# Altium PCB RF_PCB-v2.PcbDoc (part 1 of 2)
Units mm, origin at the board's own origin, x right, y up, seen from the top; angles counter-clockwise.
Board outline 99.5 x 79.5 mm, 2 copper layers (Top Layer, Bottom Layer); 69 components, 53 nets, 337 pads, 75 vias.
Unrouted connection lines stored in the file: 1.
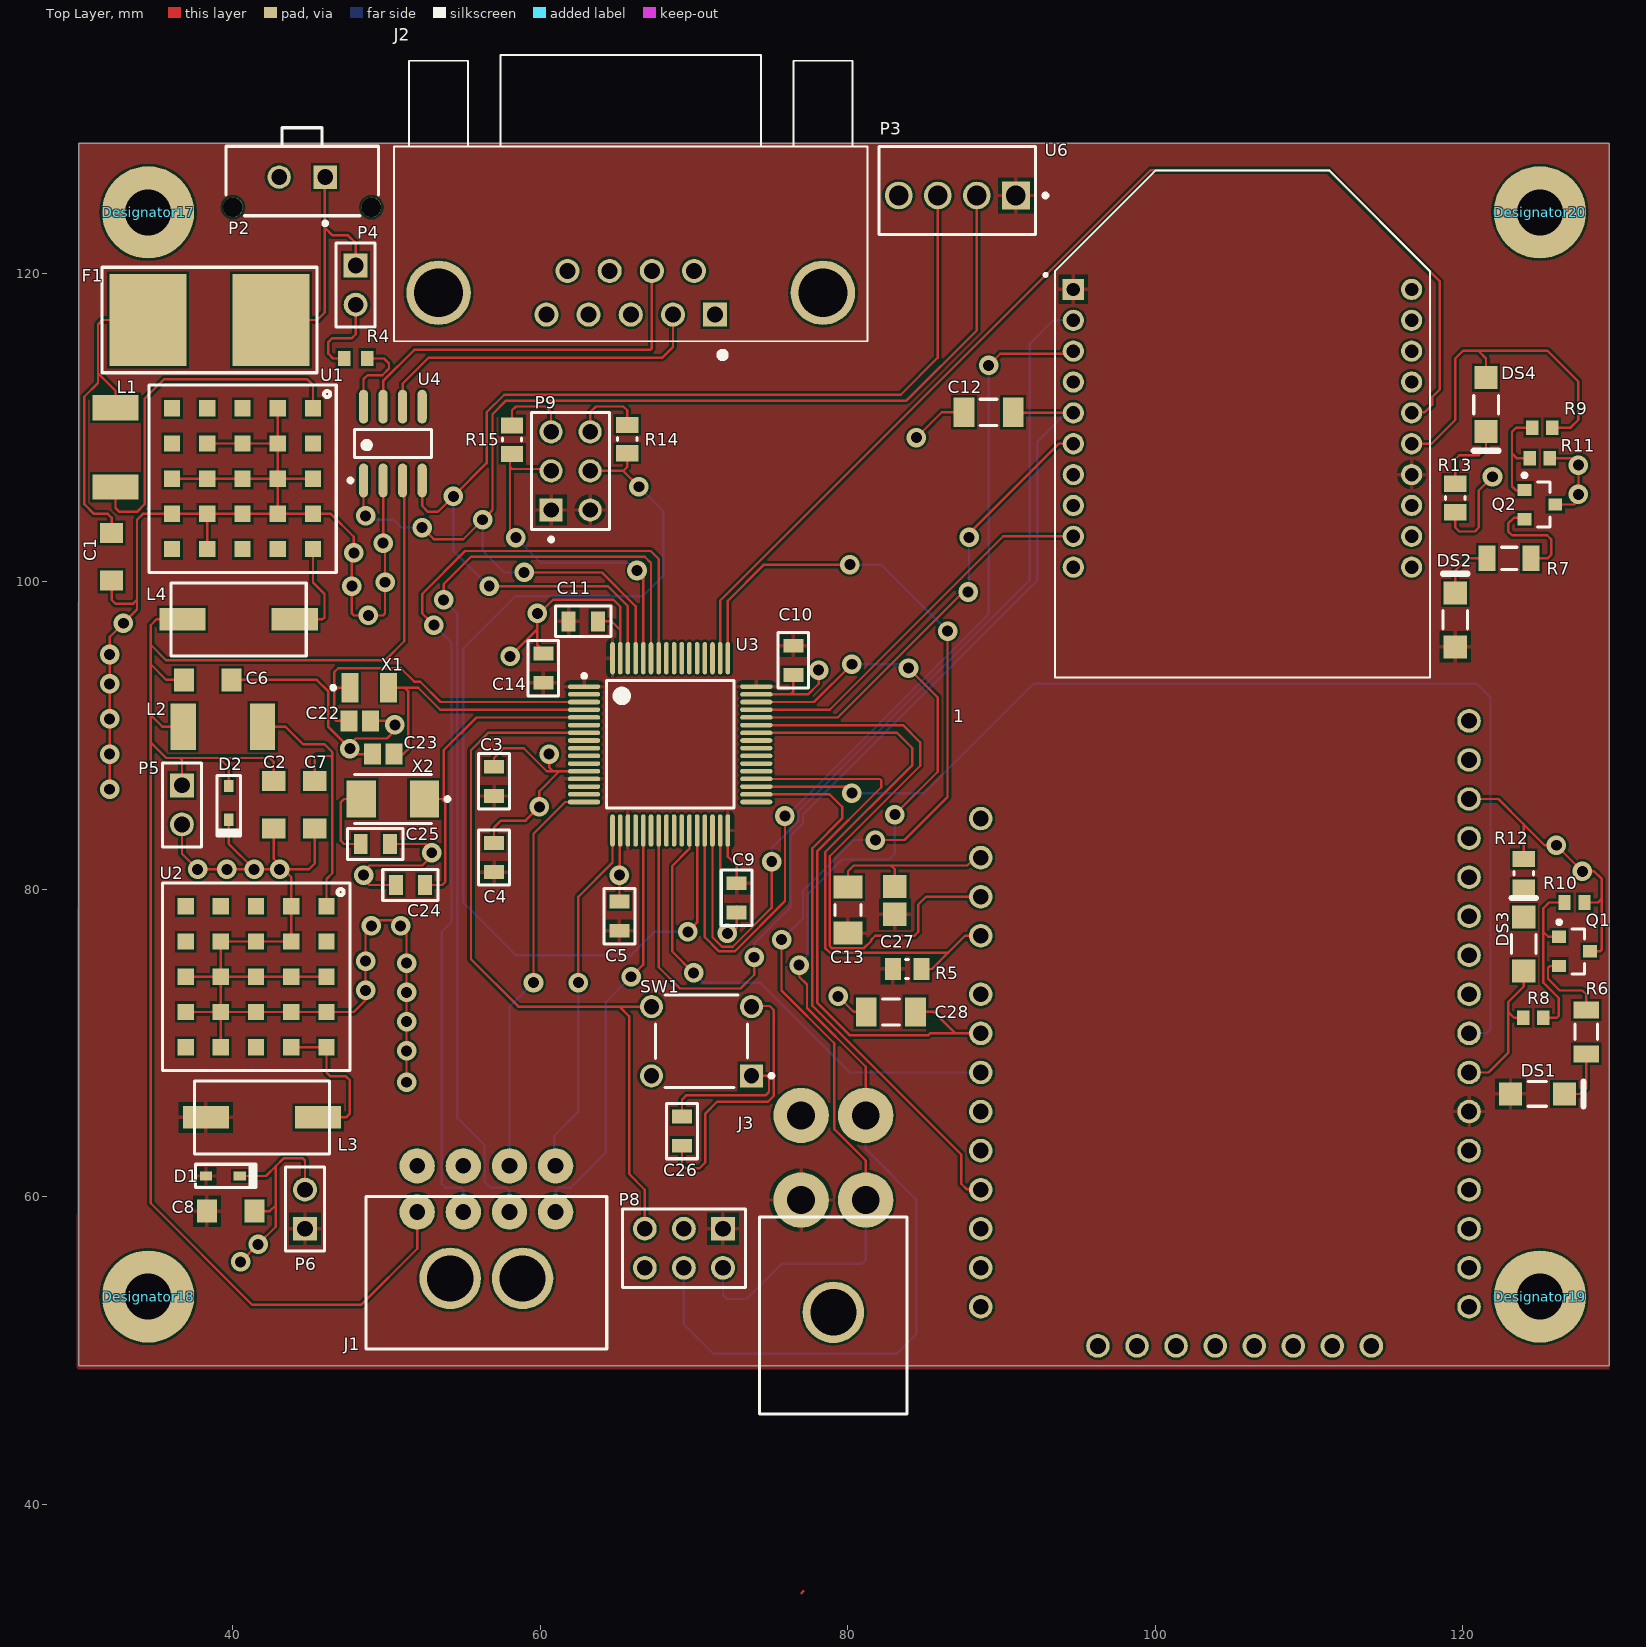
[diagram p0: Top Layer view]
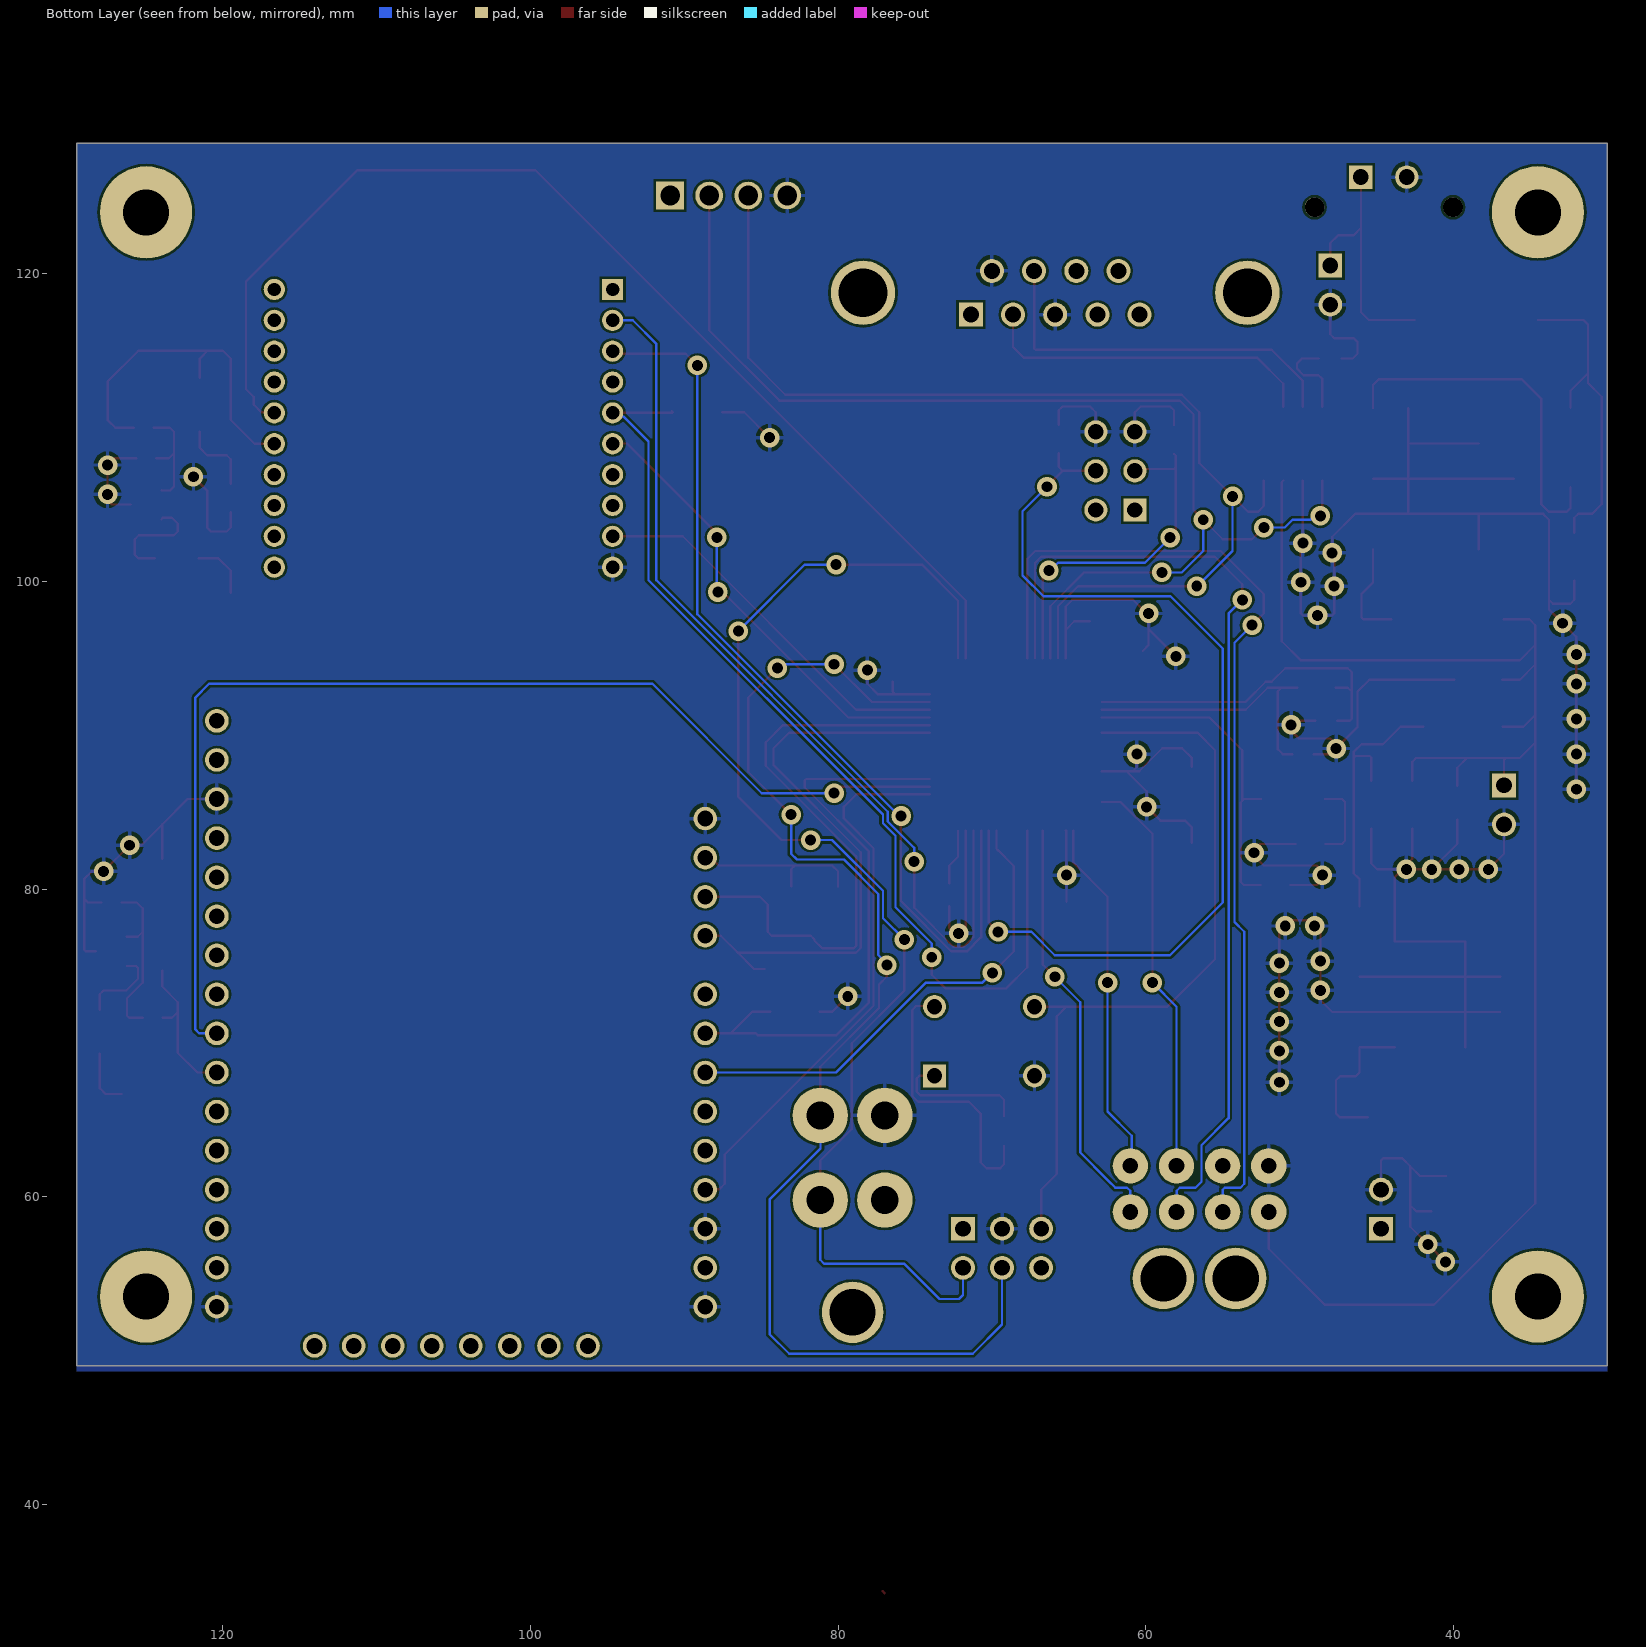
[diagram p1: Bottom Layer view, seen from below]

## Layer stack, top to bottom
Top Solder: solder mask 0.0102, Solder Resist, Dk 3.5
Top Layer: signal copper 0.0356
Dielectric 1: dielectric 0.32, FR-4, Dk 4.8
Bottom Layer: signal copper 0.0356
Bottom Solder: solder mask 0.0102, Solder Resist, Dk 3.5

## Board outline
30,49 129.5,49 129.5,128.5 30,128.5

## Design rules (kind name [scope] priority, off if disabled: settings)
Clearance [All] p1: gap=0.152 ignorepadtopadclearanceinfootprint=FALSE
HoleSize [All] p1: absolutevalues=TRUE maxlimit=100 minlimit=0.4 maxpercent=80.000 minpercent=20.000
PolygonConnect [All] p1: connectstyle=Relief reliefconductorwidth=0.254 reliefentries=4 polygonreliefangle="90 Angle" airgapwidth=0.254
RoutingVias [All] p1: holewidth=0.4 width=0.8 viastyle="Through Hole" minholewidth=0.8 minwidth=0.6 maxholewidth=100 maxwidth=100
SilkToSilkClearance [All] p1: silktosilkclearance=0
SilkToSolderMaskClearance [IsPad] p1: minsilkscreentomaskgap=0 clearancetoexposedcopper=TRUE
SolderMaskExpansion [All] p1: expansion=0.102 istentingtop=FALSE
Width [All] p1: maxlimit=100 minlimit=0.152 preferedwidth=0.152
27 further rules are at their usual default settings.

## Classes and differential pairs
component class RF_Xbee: 1 C12 C13 C27 C28 DS1 DS2 DS3 DS4 Q1 Q2 R5 R6 R7 R8 R9 R10 R11 R12 R13 U6
component class RF_STM: C3 C4 C5 C9 C10 C11 C14 C22 C23 C24 C25 C26 J1 J2 J3 P3 P8 P9 R4 R14 R15 SW1 U3 U4 X1 X2
component class RF_Power: C1 C2 C6 C7 C8 D1 D2 F1 L1 L2 L3 L4 P2 P4 P5 P6 U1 U2

## Components (designator, comment, footprint, x,y, rotation, side; value= is the part's Value field where it differs from the comment)
1 "XBEE_SMD_ADAPTER" XBEE_SMD_ADAPTER 105.156,71.882 r0 top
C1 "10uF" 1206 32.131,101.6 r270 top
C2 "22uF" 1206 42.672,85.471 r90 top
C3 "1uF" C0805 57,87 r90 top
C4 "0.1uF" C0805 57,82.05 r270 top
C5 "0.1uF" C0805 65.151,78.232 r270 top
C6 "10uF" 1206 38.38,93.599 r0 top
C7 "10uF" 1206 45.339,85.471 r90 top
C8 "22uF" 1206 39.878,59.055 r180 top
C9 "0.1uF" C0805 72.771,79.429 r90 top
C10 "0.1uF" C0805 76.454,94.869 r270 top
C11 "0.1uF" C0805 62.799,97.409 r180 top
C12 "0.01uF" CAPC1206(3216)170_M 89.154,110.998 r0 top value=10nF
C13 "1uF" CAPC3216X180X50ML20T25 80.01,78.637 r270 top
C14 "0.1uF" C0805 60.198,94.361 r270 top
C22 "6nF" CAPC2013X140X50LL20T25 48.26,90.932 r180 top
C23 "6nF" CAPC2013X140X50LL20T25 49.784,88.773 r0 top
C24 "20pF" C0805 51.562,80.264 r0 top
C25 "20pF" C0805 49.276,82.931 r180 top
C26 "0.1uF" C0805 69.215,64.262 r90 top
C27 "100pF" CAPC2013X88X50ML20T25 83.058,79.259 r270 top
C28 "0.01uF" CAPC1206(3216)170_M 82.804,72.009 r0 top value=10nF
D1 "TVS Diode 3V3" SOD-323 39.37,61.341 r180 top
D2 "TVS Diode 5V" SOD-323 39.751,85.598 r90 top
Designator17 "Comment" "3mm Mounting Hole" 34.5,124 r0 top
Designator18 "Comment" "3mm Mounting Hole" 34.5,53.5 r0 top
Designator19 "Comment" "3mm Mounting Hole" 125,53.5 r0 top
Designator20 "Comment" "3mm Mounting Hole" 125,124 r0 top
DS1 "HSMH-C150" AVAG-HSMX-C150_V 124.841,66.675 r0 top
DS2 "HSMH-C150" AVAG-HSMX-C150_V 119.5,97.5 r90 top
DS3 "HSMH-C150" AVAG-HSMX-C150_V 123.952,76.426 r90 top
DS4 "HSMH-C150" AVAG-HSMX-C150_V 121.5,111.5 r270 top
F1 "Fuseholder" "SCHURTER - 0031.7701.11 - FUSE HOLDER, PCB MOUNT" 38.5,117 r180 top
J1 "43045-0800" "Micro-Fit 3.0 8pos" 56.5,59 r0 top
J2 "D-Sub9 Header, RA" "D9 Connector" 65.786,123.952 r180 top
J3 "0353180420" "Mini-fit Jr. 4pos" 79.062,58.878 r0 top
L1 "70" 1812 32.385,108.712 r90 top
L2 "70" 1812 39.37,90.551 r180 top
L3 "98" 7427932 41.91,65.151 r180 top
L4 "98" 7427932 40.386,97.536 r180 top
P2 "66200211122" 66200211122 44.522,126.038 r0 top
P3 "640456-4" TECO-640456-4 87.122,125.095 r0 top
P4 "12V EXT" SMTC-TSW-102-26-XX-S 48,120.54 r270 top
P5 "5V EXT" SMTC-TSW-102-26-XX-S 36.703,86.741 r270 top
P6 "3V3 EXT" SMTC-TSW-102-26-XX-S 44.704,57.912 r90 top
P8 "SWD" SMTC-TSW-103-08-X-D 71.882,57.912 r180 top
P9 "M20-9980346" HRWN-M20-9980346_V 61.976,107.188 r90 top
Q1 "BJT" ONSC-SOT-23-3-318-08_V 127.254,75.946 r0 top
Q2 "BJT" ONSC-SOT-23-3-318-08_V 125,105 r0 top
R4 "1K" RESC1608X55X25ML10T15 48,114.5 r0 top
R5 "1K" RESC2013X50X30NL20T20 83.856,74.803 r180 top
R6 "464 Ohm" RESC3216X70X50NL05T20 128.016,70.711 r270 top
R7 "464 Ohm" RESC3216X70X50NL05T20 123,101.5 r180 top
R8 "10K" RESC1609X50X30NL8T20 124.572,71.628 r0 top
R9 "10K" RESC1609X50X30NL8T20 125.15,110 r180 top
R10 "10K" RESC1609X50X30NL8T20 127.254,79.121 r0 top
R11 "10K" RESC1609X50X30NL8T20 125,108 r0 top
R12 "1K" RESC2013X50X30NL20T20 123.952,81.026 r270 top
R13 "1K" RESC2013X50X30NL20T20 119.5,105.425 r90 top
R14 "1K" RESC2013X50X30NL20T20 65.659,109.256 r270 top
R15 "1K" RESC2013X50X30NL20T20 58.166,109.22 r270 top
SW1 "PTS645SM43SMTR92LFS" ITT-PTS645S-4_V 70.485,70.104 r180 top
U1 "RPM5.0-1.0" 25-BLGA 40.644,106.684 r270 top
U2 "RPM3.3-1.0" 25-BLGA 41.525,74.295 r270 top
U3 "STM32F107RCT6" STM-LQFP64_M 68.453,89.408 r0 top
U4 "MCP2551-I/SN" SOIC-SN8_N 50.419,108.966 r90 top
U6 "XBP24CAUIT-001" *MODULE_XBP24CAUIT-001 105.664,110.236 r0 top
X1 "32.768KHz" ABRA-ABS07-2_V 48.895,93.091 r0 top
X2 "8MHz" ABRA-ABM3-2_V 50.419,85.852 r180 top

## Footprints (in the part's own frame and the unit in brackets; to place one, negate y for a bottom-side part, rotate by r counter-clockwise, add the part's x,y. Pads: shape width x height; smd on the part's side, far side on the other; paste and mask are expansions set on the pad)
"3mm Mounting Hole" [mm]
  round 6 hole 3: 1(0,0)
25-BLGA [mm]
  rect 1.06x1.06 smd: A1(-4.58,4.58) A2(-2.29,4.58) A3(0,4.58) A4(2.29,4.58) A5(4.58,4.58) B1(-4.58,2.29) B2(-2.29,2.29) B3(0,2.29) B4(2.29,2.29) B5(4.58,2.29) C1(-4.58,0) C2(-2.29,0) C3(0,0) C4(2.29,0) C5(4.58,0) D1(-4.58,-2.29) D2(-2.29,-2.29) D3(0,-2.29) D4(2.29,-2.29) D5(4.58,-2.29) E1(-4.58,-4.58) E2(-2.29,-4.58) E3(0,-4.58) E4(2.29,-4.58) E5(4.58,-4.58)
  silkscreen extent -6.09,-6.09 6.09,6.09
1206 [mm]
  rect 1.3x1.5 smd: 1(-1.55,0) 2(1.55,0)
1812 [mm]
  rect 1.65x3 smd: 1(2.575,0) 2(-2.575,0)
7427932 [mm]
  rect 3x1.47 smd: 1(-3.65,0) 2(3.65,0)
  silkscreen extent -4.4,-2.37 4.4,2.37, body extent -4.1,-2.38 4.1,2.37, height 3.21
66200211122 [mm] "3.00mm Male Single Row Vertical Header, 2p"
  rect 1.52x1.52 hole 1.02: 1(1.5,0.255)
  round 1.52 hole 1.02: 2(-1.5,0.255)
  round 1.27 hole 1.27 unplated: MH1(-4.5,-1.705) MH2(4.5,-1.705)
  silkscreen extent -4.95,-2.87 4.95,3.46, body extent -4.83,-2.18 4.83,3.38, height 9.93
*MODULE_XBP24CAUIT-001 [mil]
  rect 54.25x54.25 hole 34.25: 1(-433,344.5)
  round 54.25 hole 34.25: 2(-433,265.5) 3(-433,186.5) 4(-433,107.5) 5(-433,28.5) 6(-433,-50.5) 7(-433,-129.5) 8(-433,-208.5) 9(-433,-287.5) 10(-433,-366.5) 11(433,-366.5) 12(433,-287.5) 13(433,-208.5) 14(433,-129.5) 15(433,-50.5) 16(433,28.5) 17(433,107.5) 18(433,186.5) 19(433,265.5) 20(433,344.5)
  silkscreen extent -508,-648 480,648
ABRA-ABM3-2_V [mm] "SMD, 2-Leads, Body 5x3.2mm, Pitch 4.1mm"
  rect 1.9x2.4 smd: 1(-2.05,0) 2(2.05,0)
  silkscreen extent -3.68,-1.6 2.5,1.6, body extent -2.5,-1.6 2.5,1.6, height 1.3
ABRA-ABS07-2_V [mm] "Hand Drawn, 2-Leads, Body 3.2x1.5mm, Pitch 2.5mm"
  rect 1.1x1.9 smd: 1(-1.25,0) 2(1.25,0)
  silkscreen extent -2.47,-0.12 -2.22,0.12, body extent -1.6,-0.75 1.6,0.75, height 0.9
AVAG-HSMX-C150_V [mm] "SMD, 2-Leads, Body 3.2x1.6mm"
  rect 1.5x1.5 smd: 1(-1.75,0) 2(1.75,0)
  silkscreen extent -0.6,-0.8 3,0.8, body extent -1.6,-0.8 1.6,0.8, height 1.1
C0805 [mm]
  rect 0.9x1.3 smd: 1(-0.95,0) 2(0.95,0)
  silkscreen extent -1.8,-1 1.8,1, body extent -1.05,-0.67 1.05,0.67, height 0.94
CAPC1206(3216)170_M [mm] "Chip Capacitor, Body 3.2x1.6mm, Height 1.7mm, IPC Low Density"
  rect 1.35x1.9 smd: 1(-1.6,0) 2(1.6,0)
  silkscreen extent -0.55,-0.85 0.55,0.85, body extent -1.7,-0.9 1.7,0.9, height 1.7
CAPC2013X88X50ML20T25 [mm] "Chip Capacitor, 2-Leads, Body 2.00x1.25mm, IPC Low Density"
  rect 1.5x1.55 smd: 1(-0.9,0) 2(0.9,0)
  body extent -1.1,-0.72 1.1,0.72, height 0.88
CAPC2013X140X50LL20T25 [mm] "Chip Capacitor, 2-Leads, Body 2.00x1.25mm, IPC High Density"
  rect 1.1x1.35 smd: 1(-0.7,0) 2(0.7,0)
  body extent -1.1,-0.72 1.1,0.72, height 1.4
CAPC3216X180X50ML20T25 [mm] "Chip Capacitor, 2-Leads, Body 3.40x1.80mm, IPC Low Density"
  rect 1.5x1.9 smd: 1(-1.5,0) 2(1.5,0)
  silkscreen extent -0.35,-0.85 0.35,0.85, body extent -1.7,-0.9 1.7,0.9, height 1.8
"D9 Connector" [mil]
  rect 61.5x61.5 hole 41: 1(-220,260)
  round 61.5 hole 41: 2(-112,260) 3(-4,260) 4(104,260) 5(212,260) 6(-166,148) 7(-58,148) 8(50,148) 9(158,148)
  round 165 hole 125: None(-496,204) None(488,204)
  silkscreen extent -610,-405 602,371, body extent -619,-415 609,340, height 509
HRWN-M20-9980346_V [mm] "THD, 6-Leads, Body 7.62x5.08mm, Pitch 2.54mm"
  rect 1.5x1.5 hole 1: 1(-2.54,1.27)
  round 1.5 hole 1: 2(-2.54,-1.27) 3(0,1.27) 4(0,-1.27) 5(2.54,1.27) 6(2.54,-1.27)
  silkscreen extent -4.58,-2.54 3.81,2.54, body extent -3.81,-2.54 3.81,2.54, height 8.64
ITT-PTS645S-4_V [mm] "TH, 4-Leads, Body 6x6mm"
  rect 1.5x1.5 hole 1: 1(-3.25,2.25)
  round 1.5 hole 1: 2(3.25,2.25) 3(-3.25,-2.25) 4(3.25,-2.25)
  silkscreen extent -4.68,-3 3,3, body extent -3,-3 3,3, height 4.4
"Micro-Fit 3.0 8pos" [mm]
  round 2.3 hole 1.02: 1(4.5,0) 2(1.5,0) 3(-1.5,0) 4(-4.5,0) 5(4.5,3) 6(1.5,3) 7(-1.5,3) 8(-4.5,3)
  round 4 hole 3: ""(-2.35,-4.32) ""(2.35,-4.32)
  silkscreen extent -7.83,-8.92 7.83,1, body extent -8.07,-8.95 8.08,3.29, height 8.78
"Mini-fit Jr. 4pos" [mm]
  round 3.6 hole 1.8: 1(-2.1,6.4) 2(2.1,6.4) 3(-2.1,0.9) 4(2.1,0.9)
  round 4 hole 3: ""(0,-6.4)
  silkscreen extent -4.8,-13 4.8,-0.2, body extent -4.8,-13 5.2,6.94, height 11.41
ONSC-SOT-23-3-318-08_V [mm] "SOT23, 3-Leads, Body 2.92x1.3mm, Pitch 0.95mm"
  rect 0.9x0.8 smd: 1(-1,0.95) 2(-1,-0.95) 3(1,0)
  silkscreen extent -1.12,-1.46 0.65,2.02, body extent -0.65,-1.46 0.65,1.46, height 1.11
RESC1608X55X25ML10T15 [mm] "Chip Resistor, 2-Leads, Body 1.60x0.80mm, IPC Low Density"
  rect 0.8x1 smd: 1(-0.75,0) 2(0.75,0)
  body extent -0.85,-0.45 0.85,0.45, height 0.55
RESC1609X50X30NL8T20 [mm] "Chip Resistor, 2-Leads, Body 1.65x0.95mm, IPC Medium Density"
  rect 0.8x0.95 smd: 1(-0.65,0) 2(0.65,0)
  body extent -0.82,-0.48 0.82,0.48, height 0.5
RESC2013X50X30NL20T20 [mm] "Chip Resistor, 2-Leads, Body 2.00x1.25mm, IPC Medium Density"
  rect 1.05x1.45 smd: 1(-0.925,0) 2(0.925,0)
  silkscreen extent -0.1,-0.63 0.1,0.63, body extent -1.1,-0.72 1.1,0.72, height 0.5
RESC3216X70X50NL05T20 [mm] "Chip Resistor, 2-Leads, Body 3.20x1.60mm, IPC Medium Density"
  rect 1.1x1.65 smd: 1(-1.425,0) 2(1.425,0)
  silkscreen extent -0.5,-0.72 0.5,0.72, body extent -1.63,-0.82 1.62,0.82, height 0.7
"SCHURTER - 0031.7701.11 - FUSE HOLDER, PCB MOUNT" [mm]
  rect 5x6 smd: 1(-4,0) 2(4,0)
  silkscreen extent -6.98,-3.43 6.98,3.43, body extent -6.04,-2.6 6.04,2.6, height 6.01
SMTC-TSW-102-26-XX-S [mm] ".025 SQ Post Terminal Strip Assembly, 1x2 Pins, Vertical, 2.54mm Pitch, Male"
  rect 1.55x1.55 hole 1.02: 1(0,0)
  round 1.55 hole 1.02: 2(2.54,0)
  silkscreen extent -1.46,-1.27 4,1.27, body extent -1.4,-1.27 3.81,1.27, height 8.38
SMTC-TSW-103-08-X-D [mm] ".025 SQ Post Terminal Strip Assembly, 2x3 Pins, Vertical, 2.54mm Pitch, Male"
  rect 1.55x1.55 hole 1.02: 1(0,0)
  round 1.55 hole 1.02: 2(0,2.54) 3(2.54,0) 4(2.54,2.54) 5(5.08,0) 6(5.08,2.54)
  silkscreen extent -1.46,-1.27 6.54,3.81, body extent -1.27,-1.27 6.35,3.81, height 8.38
SOD-323 [mm] "SOD, 2-Leads, Body 1.7x1.25mm"
  rect 0.8x0.6 smd: 1(-1.1,0) 2(1.1,0)
  silkscreen extent -2.16,-0.76 1.78,0.76, body extent -1.3,-0.67 1.3,0.68, height 1.1
SOIC-SN8_N [mm] "SOIC, 8-Leads, Body 4.9x3.9mm, Pitch 1.27mm, IPC Medium Density"
  oval 2.2x0.6 smd: 1(-2.4,1.905) 2(-2.4,0.635) 3(-2.4,-0.635) 4(-2.4,-1.905) 5(2.4,-1.905) 6(2.4,-0.635) 7(2.4,0.635) 8(2.4,1.905)
  silkscreen extent -2.52,-2.5 0.9,2.88, body extent -2,-2.5 2,2.5, height 1.75
STM-LQFP64_M [mm] "Thin QFP, 64-Leads, Body 10x10mm, Pitch 0.5mm, IPC Low Density"
  oval 2.1x0.3 smd: 1(-5.6,3.75) 2(-5.6,3.25) 3(-5.6,2.75) 4(-5.6,2.25) 5(-5.6,1.75) 6(-5.6,1.25) 7(-5.6,0.75) 8(-5.6,0.25) 9(-5.6,-0.25) 10(-5.6,-0.75) 11(-5.6,-1.25) 12(-5.6,-1.75) 13(-5.6,-2.25) 14(-5.6,-2.75) 15(-5.6,-3.25) 16(-5.6,-3.75) 33(5.6,-3.75) 34(5.6,-3.25) 35(5.6,-2.75) 36(5.6,-2.25) 37(5.6,-1.75) 38(5.6,-1.25) 39(5.6,-0.75) 40(5.6,-0.25) 41(5.6,0.25) 42(5.6,0.75) 43(5.6,1.25) 44(5.6,1.75) 45(5.6,2.25) 46(5.6,2.75) 47(5.6,3.25) 48(5.6,3.75)
  oval 0.3x2.1 smd: 17(-3.75,-5.6) 18(-3.25,-5.6) 19(-2.75,-5.6) 20(-2.25,-5.6) 21(-1.75,-5.6) 22(-1.25,-5.6) 23(-0.75,-5.6) 24(-0.25,-5.6) 25(0.25,-5.6) 26(0.75,-5.6) 27(1.25,-5.6) 28(1.75,-5.6) 29(2.25,-5.6) 30(2.75,-5.6) 31(3.25,-5.6) 32(3.75,-5.6) 49(3.75,5.6) 50(3.25,5.6) 51(2.75,5.6) 52(2.25,5.6) 53(1.75,5.6) 54(1.25,5.6) 55(0.75,5.6) 56(0.25,5.6) 57(-0.25,5.6) 58(-0.75,5.6) 59(-1.25,5.6) 60(-1.75,5.6) 61(-2.25,5.6) 62(-2.75,5.6) 63(-3.25,5.6) 64(-3.75,5.6)
  silkscreen extent -5.72,-4.15 4.15,4.57, body extent -5,-5 5,5, height 1.6
TECO-640456-4 [mm] "Through Hole, 4-Leads, Body 10.16x5.72mm, Pitch 2.54mm"
  rect 1.8x1.8 hole 1.27 paste+0: 1(3.81,0)
  round 1.8 hole 1.27 paste+0: 2(1.27,0) 3(-1.27,0) 4(-3.81,0)
  silkscreen extent -5.08,-2.54 5.86,3.18, body extent -5.08,-2.54 5.08,3.18, height 10.03
XBEE_SMD_ADAPTER [mm]
  round 1.53 / inner round 1.524 / far side round 1.53 hole 1.02: 1(-16.51,12.7) 2(-16.51,10.16) 3(-16.51,7.62) 4(-16.51,5.08) 5(-16.51,1.27) 6(-16.51,-1.27) 7(-16.51,-3.81) 8(-16.51,-6.35) 9(-16.51,-8.89) 10(-16.51,-11.43) 11(-16.51,-13.97) 12(-16.51,-16.51) 13(-16.51,-19.05) 14(-8.89,-21.59) 15(-6.35,-21.59) 16(-3.81,-21.59) 17(-1.27,-21.59) 18(1.27,-21.59) 19(3.81,-21.59) 20(6.35,-21.59) 21(8.89,-21.59) 22(15.24,-19.05) 23(15.24,-16.51) 24(15.24,-13.97) 25(15.24,-11.43) 26(15.24,-8.89) 27(15.24,-6.35) 28(15.24,-3.81) 29(15.24,-1.27) 30(15.24,1.27) 31(15.24,3.81) 32(15.24,6.35) 33(15.24,8.89) 34(15.24,11.43) 35(15.24,13.97) 36(15.24,16.51) 37(15.24,19.05)

## Part data
C1 C6 C7: library part CL31B106KAHNFNE, "CAP CER 10UF 25V X7R 1206", Case Code (Imperial)=1206, Case Code (Metric)=3216, Dielectric=X7R, Manufacturer=Samsung, Max Operating Temperature=125°C, Min Operating Temperature=-55°C, Package Quantity=1, Supplier Part Number 1=1276-3100-1-ND, Tolerance=10%, Voltage Rating=25V, Capacitance=10uF, Case/Package=1206, Category="Ceramic Capacitors", ComponentLink1Description=https://datasheet.ciiva.com/25795/cl31b106kahnfne-25795136.pdf?src-supplier=Digi-Key, ComponentLink1URL=https://datasheet.ciiva.com/25795/cl31b106kahnfne-25795136.pdf?src-supplier=Digi-Key, Depth=1.6mm, Height=1.6mm, Lead Free="Lead Free", Length=3.2mm, Manufacturer Part Number=CL31B106KAHNFNE, Mount="Surface Mount", Packaging="Tape and Reel", Radiation Hardening=No, RoHS=Yes, Stock 1=1201, Supplier 1=Digi-Key, Thickness=0.071inch, Width=0.063inch
C2 C8: library part CL31B226KPHNNNE, "CAP CER 22UF 10V X7R 1206", Case Code (Imperial)=1206, Case Code (Metric)=3216, Dielectric=X7R, Manufacturer=Samsung, Max Operating Temperature=125°C, Min Operating Temperature=-55°C, Package Quantity=2000, Supplier Part Number 1=1276-2769-1-ND, Tolerance=10%, Voltage Rating=10V, Capacitance=22uF, Case/Package=1206, Category="Ceramic Capacitors", ComponentLink1Description=https://datasheet.ciiva.com/25724/cl31b226kphnnne-25724443.pdf?src-supplier=Digi-Key, ComponentLink1URL=https://datasheet.ciiva.com/25724/cl31b226kphnnne-25724443.pdf?src-supplier=Digi-Key, ComponentLink2Description=https://datasheet.ciiva.com/16384/cl31b226kphnnne-16384588.pdf?src-supplier=Future+Electronics, ComponentLink2URL=https://datasheet.ciiva.com/16384/cl31b226kphnnne-16384588.pdf?src-supplier=Future+Electronics, ComponentLink3Description=https://datasheet.ciiva.com/26838/getdatasheetpartid-710483-26838941.pdf?src-supplier=Verical, ComponentLink3URL=https://datasheet.ciiva.com/26838/getdatasheetpartid-710483-26838941.pdf?src-supplier=Verical, Contact Plating=Tin, Depth=1.6mm, Lead Free="Lead Free", Length=3.2mm, Manufacturer Part Number=CL31B226KPHNNNE, Mount="Surface Mount", Packaging="Tape and Reel", Radiation Hardening=No, RoHS=Yes, Stock 1=617814, Supplier 1=Digi-Key, Termination=Wraparound, Thickness=0.071inch, Voltage Rating (DC)=10V, Width=0.063inch
C3: library part CL21B105KAFNNNE, "Cap Ceramic 1uF 25V X7R 10% SMD 0805 125C T/R", Case Code (Imperial)=0805, Case Code (Metric)=2012, Dielectric=X7R, Manufacturer=Samsung, Max Operating Temperature=125°C, Min Operating Temperature=-55°C, Package Quantity=1, Supplier Part Number 1=1276-1066-1-ND, Tolerance=10%, Voltage=25V, Capacitance=1uF, Case/Package=0805, Category=Capacitors, ComponentLink1Description=https://datasheet.ciiva.com/25800/cl21b105kafnnne-25800163.pdf?src-supplier=Digi-Key, ComponentLink1URL=https://datasheet.ciiva.com/25800/cl21b105kafnnne-25800163.pdf?src-supplier=Digi-Key, ComponentLink2Description=https://datasheet.ciiva.com/15195/getdatasheetpartid-355205-15195880.pdf?src-supplier=Verical, ComponentLink2URL=https://datasheet.ciiva.com/15195/getdatasheetpartid-355205-15195880.pdf?src-supplier=Verical, Contact Plating=Tin, Depth=1.25mm, Height=1.25mm, Lead Free="Lead Free", Length=2mm, Manufacturer Part Number=CL21B105KAFNNNE, Mount="Surface Mount", Packaging="Tape and Reel", Pricing 1="1 = 0.10000, 10 = 0.07600, 100 = 0.03380, 500 = 0.02416, 1000 = 0.01898 (USD)", Radiation Hardening=No, RoHS=Yes, Stock 1=1606570, Supplier 1=Digi-Key, Thickness=0.053inch, Voltage Rating=25V, Voltage Rating (DC)=25V, Width=0.049inch
C4 C5 C9 C10 C11 C14 C26: library part CL21B104KBCWPNC, "CAP CER 0.1UF 50V X7R 0805", Capacitance=100nF, Case Code (Imperial)=0805, Case Code (Metric)=2012, Manufacturer=Samsung, Max Operating Temperature=125°C, Min Operating Temperature=-55°C, Ratings=AEC-Q200, Supplier Part Number 1=1276-6557-1-ND, Tolerance=10%, Voltage Rating=50V, Case/Package=0805, Category=Capacitors, Features="Soft Termination", Length=0.079inch, Manufacturer Part Number=CL21B104KBCWPNC, Mount="Surface Mount", Packaging="Tape and Reel", Pricing 1="1 = 0.10000, 10 = 0.06700, 100 = 0.02990, 500 = 0.02138, 1000 = 0.01680 (USD)", RoHS=Yes, Stock 1=6545, Supplier 1=Digi-Key, Thickness=0.053inch, Width=0.049inch
C12 C28: library part CMP-1037-03508-1, "CAP 10nF 50V ±5% 1206 (3216 Metric) Thickness 1.7mm SMD", Case-EIA=1206, Case-Metric=3216, Rated Voltage="50 V", Tolerance=Â±5%, Max Thickness="1.7 mm", Technology=SMT
C13: library part CMP-2000-04991-1, "Chip Capacitor, 1 uF, +/- 10%, 25 V, -55 to 125 degC, 1206 (3216 Metric), RoHS, Tape and Reel", Capacitance - nF=1000nF, Case Code - in=1206, Case Code - mm=3216, Case Height=1.6mm, Case Length=3.2mm, Dielectric=X7R, Manufacturer=Kemet, Maximum Operating Temperature=+125C, Minimum Operating Temperature=-55C, Operating Temperature Range=-55Cto+125C, Package / Case=1206(3216metric), Package Description="2-Pin Surface Mount Device, Body 3.2 x 1.6 mm", Temperature Coefficient / Code=+/-15%, Tolerance=10%, Voltage Rating=25V, =C1206C105K3RAC7800, Brand=Kemet, Capacitance=1uF, Case Width=1.6mm, Class=Class1, Datasheet URL=https://ciiva.com/datasheet-click-18194173?src=ciiva&sig=6daff8c4, Datasheet Version=Jul-14, Dimensions=1.6mmWx3.2mmLx1.6mmH, Factory Pack Quantity=2000, Manufacturer URL=http://www.kemet.com/, Package Reference=1206, Packaging=Reel, Product=GeneralTypeMLCCs, Product Category=MultilayerCeramicCapacitorsMLCC-SMD/SMT, RoHS=Details, Series=C1206C, Termination Style=SMD/SMT, Type=SMDMLCCX7R6.3-250VDCCommericalGrade, Voltage Rating DC=25V
C22 C23: library part CMP-2000-05810-1, "Chip Capacitor, 2.2 uF, +/- 10%, 10 V, -55 to 85 degC, 0805 (2012 Metric), RoHS, Tape and Reel", Capacitance=2.2µF, Case Size/Dimension=0805, Dielectric=X5R, Manufacturer=AVX, Package Description="2-Pin Surface Mount Device, Body 2.01 x 1.25 mm", Rated Voltage=10V, Tolerance (%)=±10%, Datasheet URL=http://datasheets.avx.com/cx5r.pdf, Datasheet Version=05/2016, Manufacturer URL=http://www.avx.com/, Mounting Technology=SurfaceMount, Package Reference=0805
C24 C25: library part C0805C200J5GACTU, "CAP CER 20PF 50V C0G/NP0 0805", Capacitance=10nF, Case Code (Imperial)=0805, Case Code (Metric)=2012, Dielectric=X7R, Manufacturer=Samsung, Manufacturer Part Number=CL21B103KBANNNC, Max Operating Temperature=125°C, Min Operating Temperature=-55°C, Supplier Part Number 1=399-8033-1-ND, Tolerance=10%, Voltage=50V, Case/Package=0805, Category=Capacitors, ComponentLink1Description=https://www.digikey.com/product-detail/en/kemet/C0805C200J5GACTU/399-8033-1-ND/3471756, ComponentLink1URL=https://www.digikey.com/product-detail/en/kemet/C0805C200J5GACTU/399-8033-1-ND/3471756, Contact Plating=Tin, Depth=1.25mm, Height=0.65mm, Lead Free="Lead Free", Length=2mm, Material=Ceramic, Mount="Surface Mount", Packaging="Tape and Reel", Radiation Hardening=No, RoHS=Yes, Supplier 1=Digi-Key, Thickness=0.03inch, Voltage Rating=50V, Voltage Rating (DC)=50V, Width=0.049inch
C27: library part CMP-2007-00223-1, Manufacturer=Kemet, Part Number=C0805C101J2GACTU
D1: library part CDSOD323-T03S, "ESD Suppressor TVS ±30kV 2-Pin SOD-323 T/R", Breakdown Voltage=4V, Capacitance=500pF, Case/Package=SOD-323-2, Clamping Voltage=10.9V, Leakage Current=125uA, Manufacturer=Bourns, Max Operating Temperature=150°C, Max Power Dissipation=500W, Max Surge Current=43A, Min Operating Temperature=-55°C, Operating Supply Voltage=3.3V, Package Quantity=3000, Power Line Protection=No, Supplier Part Number 1=CDSOD323-T03SCT-ND, Category="Circuit Protection", ComponentLink1Description=https://datasheet.ciiva.com/22685/1671000-22685541.pdf?src-supplier=Element14, ComponentLink1URL=https://datasheet.ciiva.com/22685/1671000-22685541.pdf?src-supplier=Element14, ComponentLink2Description=https://datasheet.ciiva.com/6575/cdsod323-txxsc-6575941.pdf?src-supplier=Digi-Key, ComponentLink2URL=https://datasheet.ciiva.com/6575/cdsod323-txxsc-6575941.pdf?src-supplier=Digi-Key, ComponentLink3Description=https://datasheet.ciiva.com/11193/cdsod323-txxsc-11193742.pdf?src-supplier=Avnet, ComponentLink3URL=https://datasheet.ciiva.com/11193/cdsod323-txxsc-11193742.pdf?src-supplier=Avnet, Composition=Zener, Contact Plating=Tin, Depth=1.45mm, Direction=Unidirectional, Element Configuration=Single, Length=1.9mm, Manufacturer Part Number=CDSOD323-T03S, Min Breakdown Voltage=4V, Mount="Surface Mount", Number of Channels=1, Number of Pins=2, Number of Unidirectional Channels=1, Packaging="Tape and Reel", Peak Pulse Current=43A, Peak Pulse Power=500W, Polarity=Unidirectional, Pricing 1="1 = 0.72000, 10 = 0.60600, 25 = 0.53000, 100 = 0.45420, 250 = 0.39368, 500 = 0.33310, 1000 = 0.25740 (USD)", Radiation Hardening=No, REACH SVHC="No SVHC", Reverse Standoff Voltage=3.3V, RoHS=Yes, Stock 1=99362, Supplier 1=Digi-Key, Termination=SMD/SMT, Working Voltage=3.3V
D2: library part SD05T1G, "TVS DIODE 5V 9.8V SOD323", Breakdown Voltage=6.75V, Capacitance=350pF, Case/Package=SOD-323-2, Clamping Voltage=14.5V, Leakage Current=10uA, Manufacturer="ON Semiconductor", Max Breakdown Voltage=7.3V, Max Operating Temperature=150°C, Max Output Current=24A, Max Power Dissipation=200mW, Min Breakdown Voltage=6.2V, Min Operating Temperature=-55°C, Operating Supply Voltage=5V, Package Quantity=1, Peak Pulse Power=350W, Power Line Protection=No, Supplier Part Number 1=SD05T1GOSCT-ND, Test Current=1mA, Category="Circuit Protection", ComponentLink1Description=https://datasheet.ciiva.com/4507/sd05t1-d-241634-4507873.pdf?src-supplier=Mouser, ComponentLink1URL=https://datasheet.ciiva.com/4507/sd05t1-d-241634-4507873.pdf?src-supplier=Mouser, ComponentLink2Description=https://datasheet.ciiva.com/16200/sd05t1-d-16200994.pdf?src-supplier=Future+Electronics, ComponentLink2URL=https://datasheet.ciiva.com/16200/sd05t1-d-16200994.pdf?src-supplier=Future+Electronics, ComponentLink3Description=https://datasheet.ciiva.com/15143/getdatasheetpartid-117154-15143559.pdf?src-supplier=Verical, ComponentLink3URL=https://datasheet.ciiva.com/15143/getdatasheetpartid-117154-15143559.pdf?src-supplier=Verical, ComponentLink4Description=https://datasheet.ciiva.com/30478/0900766b81250bd7-30478714.pdf?src-supplier=RSComponents, ComponentLink4URL=https://datasheet.ciiva.com/30478/0900766b81250bd7-30478714.pdf?src-supplier=RSComponents, ComponentLink5Description=https://datasheet.ciiva.com/339/sd05t1-d-339830.pdf?src-supplier=Digi-Key, ComponentLink5URL=https://datasheet.ciiva.com/339/sd05t1-d-339830.pdf?src-supplier=Digi-Key, ComponentLink6Description=https://datasheet.ciiva.com/339/sd05t1-d-339831.pdf?src-supplier=Digi-Key, ComponentLink6URL=https://datasheet.ciiva.com/339/sd05t1-d-339831.pdf?src-supplier=Digi-Key, ComponentLink7Description=https://datasheet.ciiva.com/11193/sd05t1-d-11193467.pdf?src-supplier=Avnet, ComponentLink7URL=https://datasheet.ciiva.com/11193/sd05t1-d-11193467.pdf?src-supplier=Avnet, ComponentLink8Description=https://datasheet.ciiva.com/22637/1878253-22637228.pdf?src-supplier=Element14, ComponentLink8URL=https://datasheet.ciiva.com/22637/1878253-22637228.pdf?src-supplier=Element14, ComponentLink9Description=https://datasheet.ciiva.com/25956/sd05t1-d-25956638.pdf?src-supplier=Avnet+Europe, ComponentLink9URL=https://datasheet.ciiva.com/25956/sd05t1-d-25956638.pdf?src-supplier=Avnet+Europe, Composition=Zener, Contact Plating=Tin, Depth=1.25mm, Direction=Unidirectional, Element Configuration=Single, ESD Protection=Yes, Height=1mm, Lead Free="Lead Free", Length=1.7mm, Manufacturer Part Number=SD05T1G, Max Reverse Leakage Current=10uA, Max Surge Current=24A, Number of Elements=1, Number of Pins=2, Number of Unidirectional Channels=1, Packaging="Tape and Reel", Peak Pulse Current=24A, Polarity=Unidirectional, Power Dissipation=350W, Pricing 1="1 = 0.49000, 10 = 0.36500, 100 = 0.20680, 500 = 0.13698, 1000 = 0.10502 (USD)", Radiation Hardening=No, REACH SVHC="No SVHC", Reverse Breakdown Voltage=6.2V, Reverse Standoff Voltage=5V, RoHS=Yes, Stock 1=61559, Supplier 1=Digi-Key, Termination=SMD/SMT, Voltage Rating (DC)=5V, Width=1.35mm, Working Voltage=5V
DS1 DS2 DS3 DS4: library part CMP-2000-06426-1, "LED Uni-Color Red, 65 mW, 25 mA, -40 to 85 degC, 2-Pin SMD, RoHS, Tape and Reel", Emitting Color=Red, Forward Current=25mA, Forward Voltage=2.6V, Manufacturer=Avago, Operating Temp Range=-40Cto85C, Operating Temperature Classification=Industrial, Package Description="2-Pin Surface Mount Device, Body 3.2 x 1.6 mm", Package Reference=HSMX-C150, Package Type=ChipLed, Power Dissipation=78W, Reverse Voltage=5V, Test Current (It)=20mA, Chip Material=GaAlAs, Datasheet URL=http://media.digikey.com/pdf/Data%20Sheets/Avago%20PDFs/HSMz-Czzz.pdf, Datasheet Version=03/2012, DELETED=Compliant, Dominant Wave Length=639nm, High Brightness=No, Lens Dimensions=2x1.6x0.6mm, Lens Type=ColorlessDiffused, Lum Intensity=17mcd, Luminous Intensity=17mcd, Main Category=ChipLED, Manufacturer URL=http://www.avagotech.com/, Mounting=SurfaceMount, Mounting Technology=SurfaceMount, Number of  Elements=1, Packaging=TapeandReel, Peak Wavelength=660nm, Pin Count=2, Product Depth (mm)=1.6mm, Product Height (mm)=1.1mm, Product Length (mm)=3.2mm, Rad Hardened=No, Shape Type=Rectangular, Type=Uni-Color, Viewing Angle=170deg
F1: library part 0031.7701.11, "SCHURTER - 0031.7701.11 - FUSE HOLDER, PCB MOUNT", Color=White, Current Rating=5A, Manufacturer=Schurter, Max Operating Temperature=85°C, Min Operating Temperature=-40°C, Package Quantity=100, Supplier Part Number 1=486-1991-ND, Voltage=125V, Body Material=Thermoplastic, Category="Circuit Protection", ComponentLink1Description=https://datasheet.ciiva.com/1270/typ-omh-125-1270896.pdf?src-supplier=Element14, ComponentLink1URL=https://datasheet.ciiva.com/1270/typ-omh-125-1270896.pdf?src-supplier=Element14, ComponentLink2Description=https://datasheet.ciiva.com/7496/typ-omh-125-7496724.pdf?src-supplier=Digi-Key, ComponentLink2URL=https://datasheet.ciiva.com/7496/typ-omh-125-7496724.pdf?src-supplier=Digi-Key, ComponentLink3Description=https://datasheet.ciiva.com/16215/typ-omh-125-16215096.pdf?src-supplier=Onlinecomponents.com, ComponentLink3URL=https://datasheet.ciiva.com/16215/typ-omh-125-16215096.pdf?src-supplier=Onlinecomponents.com, ComponentLink4Description=https://datasheet.ciiva.com/30058/73typ-omh-125-30058618.pdf?src-supplier=Onlinecomponents.com, ComponentLink4URL=https://datasheet.ciiva.com/30058/73typ-omh-125-30058618.pdf?src-supplier=Onlinecomponents.com, ComponentLink5Description=https://datasheet.ciiva.com/14128/awomh125-data-e-14128364.pdf?src-supplier=Distrelec, ComponentLink5URL=https://datasheet.ciiva.com/14128/awomh125-data-e-14128364.pdf?src-supplier=Distrelec, ComponentLink6Description=https://datasheet.ciiva.com/1221/1925349-1221826.pdf?src-supplier=Newark, ComponentLink6URL=https://datasheet.ciiva.com/1221/1925349-1221826.pdf?src-supplier=Newark, ComponentLink7Description=https://datasheet.ciiva.com/3014/typ-omh-125-3014522.pdf?src-supplier=Avnet, ComponentLink7URL=https://datasheet.ciiva.com/3014/typ-omh-125-3014522.pdf?src-supplier=Avnet, ComponentLink8Description=https://datasheet.ciiva.com/4480/typ-omh-125-4480427.pdf?src-supplier=Mouser, ComponentLink8URL=https://datasheet.ciiva.com/4480/typ-omh-125-4480427.pdf?src-supplier=Mouser, ComponentLink9Description=https://datasheet.ciiva.com/17405/typ-omh-125-17405484.pdf?src-supplier=Avnet+Europe, ComponentLink9URL=https://datasheet.ciiva.com/17405/typ-omh-125-17405484.pdf?src-supplier=Avnet+Europe, ComponentLink10Description=Digikey, ComponentLink10URL=https://www.digikey.ca/product-detail/en/schurter-inc/0031.7701.11/486-1991-ND/640027, Contact Material="Copper Alloy", Contact Plating=Tin, Depth=5.2mm, Fuse Current=5A, Height=6mm, Illumination Type=Illuminated, Lead Free="Lead Free", Length=12mm, Manufacturer Part Number=0031.7701.11, Material=Tin, Mount="Surface Mount", Number of Circuits=1, Number of Poles=1, Packaging=Bulk, Pricing 1="1 = 1.39000, 50 = 1.03400, 100 = 0.93100, 500 = 0.70300, 1000 = 0.52080 (USD)", Radiation Hardening=No, REACH SVHC="No SVHC", RoHS=Yes, Stock 1=11381, Supplier 1=Digi-Key, Terminal Material=Brass, Termination=SMD/SMT, Voltage Rating=125V, Voltage Rating (AC)=125V, Voltage Rating (DC)=125V, Weight=0.016932oz, Width=5.2mm
J1: "Micro-fit 3.0 8pos right-angle", Case/Package=SMC, Color=Black, Contact Resistance=10mR, Current Rating=5A, Flammability Rating="UL94 V-0", Insulation Resistance=1GR, Manufacturer=Molex, Max Operating Temperature=105°C, Max Voltage Rating (DC)=250.25kV, Min Operating Temperature=-40°C, Package Quantity=1440, Supplier Part Number 1=WM1816-ND, Voltage Rating=600V, Voltage Rating (AC)=250V, Approvals=UL,CSA,TUV, Category="Headers and Wire Housings", ComponentLink1Description=https://datasheet.ciiva.com/5158/0430450800-pcb-headers-142625-5158817.pdf?src-supplier=Mouser, ComponentLink1URL=https://datasheet.ciiva.com/5158/0430450800-pcb-headers-142625-5158817.pdf?src-supplier=Mouser, ComponentLink2Description=https://datasheet.ciiva.com/7683/27645-7683683.pdf?src-supplier=Element14, ComponentLink2URL=https://datasheet.ciiva.com/7683/27645-7683683.pdf?src-supplier=Element14, ComponentLink3Description=https://datasheet.ciiva.com/11751/0900766b80027348-11751142.pdf?src-supplier=RSComponents, ComponentLink3URL=https://datasheet.ciiva.com/11751/0900766b80027348-11751142.pdf?src-supplier=RSComponents, ComponentLink4Description=https://datasheet.ciiva.com/30198/267770430450800-pcb-headers-30198875.pdf?src-supplier=Onlinecomponents.com, ComponentLink4URL=https://datasheet.ciiva.com/30198/267770430450800-pcb-headers-30198875.pdf?src-supplier=Onlinecomponents.com, ComponentLink5Description=https://datasheet.ciiva.com/19462/883536-19462164.pdf?src-supplier=Jameco, ComponentLink5URL=https://datasheet.ciiva.com/19462/883536-19462164.pdf?src-supplier=Jameco, ComponentLink6Description=https://datasheet.ciiva.com/14155/04402310-14155206.pdf?src-supplier=Distrelec, ComponentLink6URL=https://datasheet.ciiva.com/14155/04402310-14155206.pdf?src-supplier=Distrelec, ComponentLink7Description=https://datasheet.ciiva.com/16657/0430450800-pcb-headers-16657964.pdf?src-supplier=Avnet+Europe, ComponentLink7URL=https://datasheet.ciiva.com/16657/0430450800-pcb-headers-16657964.pdf?src-supplier=Avnet+Europe, ComponentLink8Description=https://datasheet.ciiva.com/10087/0430450800-pcb-headers-10087853.pdf?src-supplier=Avnet, ComponentLink8URL=https://datasheet.ciiva.com/10087/0430450800-pcb-headers-10087853.pdf?src-supplier=Avnet, ComponentLink9Description=https://datasheet.ciiva.com/1443/1850016-1443537.pdf?src-supplier=Element14, ComponentLink9URL=https://datasheet.ciiva.com/1443/1850016-1443537.pdf?src-supplier=Element14, Contact Material=Brass,Tin, Contact Plating=Tin, Depth=12.2mm, Diameter=3mm, Gender=Male, Glow Wire Compliant=Compliant, Halogen Free="Low Halogen", Height=8.77mm, Housing Color=Black, Housing Material=Thermoplastic, Lead Free="Lead Free", Length=16.15mm, Manufacturer Part Number=43045-0800, Material=Polyester, Max Current Rating=5A, Mount="Through Hole", Number of Circuits=8, Number of Contacts=8, Number of Poles=8, Number of Positions=8, Number of Rows=2, Orientation="Right Angle", Packaging=Tray, Pitch=3mm, Radiation Hardening=No, REACH SVHC=Unknown, RoHS=Yes, Row Spacing=3mm, Stock 1=7880, Supplier 1=Digi-Key, Termination=Solder, Voltage Rating (DC)=250V, Working Voltage=250V
J2: library part 5747840-6, "CONN D-SUB PLUG 9POS R/A SOLDER", Case/Package=Metal, Color=Black, Current Rating=6A, Flammability Rating="UL94 V-0", Manufacturer="TE Connectivity", Max Operating Temperature=105°C, Min Operating Temperature=-55°C, Package Quantity=130, Supplier Part Number 1=A32094-ND, Voltage Rating=125V, Approvals=CSA,UL, Body Material=Metal, Body Plating=Tin, Category=Connectors, ComponentLink1Description=https://www.verical.com/server-webapp/html/getDatasheet?partID=46840&src-supplier=Verical, ComponentLink1URL=https://www.verical.com/server-webapp/html/getDatasheet?partID=46840&src-supplier=Verical, ComponentLink2Description=https://www.te.com/commerce/DocumentDelivery/DDEController?Action=srchrtrv&DocNm=82068_AMPLIMITE_Right-Angle_Posted_Conn&DocType=CS&DocLang=English&src-supplier=Digi-Key, ComponentLink2URL=https://www.te.com/commerce/DocumentDelivery/DDEController?Action=srchrtrv&DocNm=82068_AMPLIMITE_Right-Angle_Posted_Conn&DocType=CS&DocLang=English&src-supplier=Digi-Key, ComponentLink3Description=http://www.jameco.com/Jameco/Products/ProdDS/853231.pdf?src-supplier=Jameco, ComponentLink3URL=http://www.jameco.com/Jameco/Products/ProdDS/853231.pdf?src-supplier=Jameco, ComponentLink4Description=http://www.te.com/commerce/DocumentDelivery/DDEController?Action=srchrtrv&DocNm=82068_AMPLIMITE_Right-Angle_Posted_Conn&DocType=Catalog+Section&DocLang=English&src-supplier=Avnet+Europe, ComponentLink4URL=http://www.te.com/commerce/DocumentDelivery/DDEController?Action=srchrtrv&DocNm=82068_AMPLIMITE_Right-Angle_Posted_Conn&DocType=Catalog+Section&DocLang=English&src-supplier=Avnet+Europe, ComponentLink5Description=http://www.te.com/commerce/DocumentDelivery/DDEController?Action=srchrtrv&DocNm=82068_AMPLIMITE_Right-Angle_Posted_Conn&DocType=Catalog+Section&DocLang=English&src-supplier=Avnet, ComponentLink5URL=http://www.te.com/commerce/DocumentDelivery/DDEController?Action=srchrtrv&DocNm=82068_AMPLIMITE_Right-Angle_Posted_Conn&DocType=Catalog+Section&DocLang=English&src-supplier=Avnet, ComponentLink6Description=http://www.te.com/commerce/DocumentDelivery/DDEController?Action=srchrtrv&DocNm=82068_AMPLIMITE_Right-Angle_Posted_Conn&DocType=Catalog+Section&DocLang=English&PartCntxt=&src-supplier=Element14, ComponentLink6URL=http://www.te.com/commerce/DocumentDelivery/DDEController?Action=srchrtrv&DocNm=82068_AMPLIMITE_Right-Angle_Posted_Conn&DocType=Catalog+Section&DocLang=English&PartCntxt=&src-supplier=Element14, Connector Type=Plug, Contact Material=Brass, Contact Plating=Gold,Nickel,Tin, Contact Post Length=3.17mm, Contact Shape=Round, Depth=18.62mm, Gender=Male, Height=12.55mm, Hole Diameter=0.125inch, Housing Color=Black, Housing Material=Nylon, Length=30.81mm, Manufacturer Part Number=5747840-6, Material=Metal, Mating Connector Lock="Yes (With)", Mating Retention="Yes (With)", Mount="Through Hole", Number of Contacts=9, Number of Ports=1, Number of Positions=9, Number of Rows=2, Number of Terminals=9, Orientation="Right Angle", Packaging=Tray, PCB Mount Alignment="Yes (With)", PCB Mount Retention=With, PCB Mounting Orientation="Right Angle", PCB Thickness=1.57mm, Pitch=2.74mm, Plating=Tin, Preloaded=Yes, Pricing 1="1 = 4.13000, 10 = 3.96400, 25 = 3.63360, 50 = 3.46860, 130 = 3.30338, 260 = 2.89046, 520 = 2.80788, 1040 = 2.39496, 2600 = 2.22980 (USD)", Radiation Hardening=No, REACH SVHC="No SVHC", RoHS=Yes, Sealable="No (Without)", Shell Material=Steel, Stock 1=2830, Supplier 1=Digi-Key, Termination=Solder, Width=12.55mm
J3: "Conn Power HDR 4 POS 4.2mm Solder RA Thru-Hole 4 Terminal 1 Port Mini-Fit® Bag", Color=Natural, Manufacturer=Molex, Max Operating Temperature=105°C, Min Operating Temperature=-40°C, Package Quantity=5000, Supplier Part Number 1=WM13195-ND, Category="Headers and Wire Housings", ComponentLink1Description=https://datasheet.ciiva.com/6840/353180820-sd-6840231.pdf?src-supplier=Digi-Key, ComponentLink1URL=https://datasheet.ciiva.com/6840/353180820-sd-6840231.pdf?src-supplier=Digi-Key, Connector Type="Male Pin", Contact Material=Brass, Contact Mating Length=0.208inch, Contact Plating=Tin, Depth=12.8mm, Fastening Type=Ramp, Housing Material=Nylon, Length=9.6mm, Manufacturer Part Number=0353180420, Mount="Through Hole", Number of Contacts=4, Number of Ports=1, Number of Positions=4, Number of Rows=2, Number of Terminals=4, Orientation="Right Angle", Packaging=Bulk, Pitch=4.2mm, RoHS=Yes, Row Spacing=0.165inch, Stock 1=17776, Supplier 1=Digi-Key, Termination=Solder
L1 L2: library part 742792510, "WURTH ELEKTRONIK - 742792510 - FERRITE BEAD, 70R, 6A, 1812", Case Code (Imperial)=1812, Case Code (Metric)=4532, Case/Package=SMD/SMT, Current Rating=6A, DC Resistance (DCR)=30mR, Manufacturer="Wurth Electronics", Max DC Current=3mA, Max Operating Temperature=125°C, Min Operating Temperature=-55°C, Package Quantity=1, Supplier Part Number 1=732-1640-1-ND, Test Frequency=100MHz, Tolerance=25%, Category="Ferrite Beads and Chips", ComponentLink1Description=https://datasheet.ciiva.com/1475/1695992-1475250.pdf?src-supplier=Farnell, ComponentLink1URL=https://datasheet.ciiva.com/1475/1695992-1475250.pdf?src-supplier=Farnell, ComponentLink2Description=https://datasheet.ciiva.com/11803/0900766b80bbd134-11803157.pdf?src-supplier=RSComponents, ComponentLink2URL=https://datasheet.ciiva.com/11803/0900766b80bbd134-11803157.pdf?src-supplier=RSComponents, ComponentLink3Description=https://datasheet.ciiva.com/23762/742792510-23762981.pdf?src-supplier=Newark, ComponentLink3URL=https://datasheet.ciiva.com/23762/742792510-23762981.pdf?src-supplier=Newark, ComponentLink4Description=https://datasheet.ciiva.com/4940/742792510-72179-4940456.pdf?src-supplier=Mouser, ComponentLink4URL=https://datasheet.ciiva.com/4940/742792510-72179-4940456.pdf?src-supplier=Mouser, ComponentLink5Description=https://datasheet.ciiva.com/1013/742792510-1013644.pdf?src-supplier=Digi-Key, ComponentLink5URL=https://datasheet.ciiva.com/1013/742792510-1013644.pdf?src-supplier=Digi-Key, ComponentLink6Description=https://datasheet.ciiva.com/1013/742792510-1013645.pdf?src-supplier=Digi-Key, ComponentLink6URL=https://datasheet.ciiva.com/1013/742792510-1013645.pdf?src-supplier=Digi-Key, ComponentLink7Description=https://datasheet.ciiva.com/1126/1695992-1126824.pdf?src-supplier=Element14, ComponentLink7URL=https://datasheet.ciiva.com/1126/1695992-1126824.pdf?src-supplier=Element14, ComponentLink8Description=https://datasheet.ciiva.com/1013/742792510-1013646.pdf?src-supplier=Digi-Key, ComponentLink8URL=https://datasheet.ciiva.com/1013/742792510-1013646.pdf?src-supplier=Digi-Key, Depth=3.2mm, Height=1.5mm, Impedance=70R, Lead Free="Lead Free", Length=4.5mm, Manufacturer Part Number=742792510, Material=Ferrite, Max Current Rating=6A, Mount="Surface Mount", Number of Lines=1, Packaging="Tape and Reel", REACH SVHC=Unknown, Resistance=30mR, RoHS=Yes, Stock 1=5974, Supplier 1=Digi-Key, Termination=SMD/SMT, Weight=0.003951oz, Width=3.2mm
L3 L4: library part 7427932, "Ferrite Bead 98 Ohm 2SMD 1LN", Case Code (Imperial)=1812, Case Code (Metric)=4532, Case/Package=SMD/SMT, DC Resistance (DCR)=0.9mR, Manufacturer="Wurth Electronics", Max Current Rating=6A, Max Operating Temperature=125°C, Min Operating Temperature=-55°C, Package Quantity=1, Supplier Part Number 1=732-2394-1-ND, Test Frequency=100MHz, Tolerance=25%, Category="Ferrite Beads and Chips", ComponentLink1Description=https://datasheet.ciiva.com/1014/7427932-1014097.pdf?src-supplier=Digi-Key, ComponentLink1URL=https://datasheet.ciiva.com/1014/7427932-1014097.pdf?src-supplier=Digi-Key, ComponentLink2Description=https://datasheet.ciiva.com/1466/1696119-1466626.pdf?src-supplier=Element14, ComponentLink2URL=https://datasheet.ciiva.com/1466/1696119-1466626.pdf?src-supplier=Element14, ComponentLink3Description=https://datasheet.ciiva.com/11796/0900766b80f886b0-11796146.pdf?src-supplier=RSComponents, ComponentLink3URL=https://datasheet.ciiva.com/11796/0900766b80f886b0-11796146.pdf?src-supplier=RSComponents, ComponentLink4Description=https://datasheet.ciiva.com/23763/7427932-23763047.pdf?src-supplier=Newark, ComponentLink4URL=https://datasheet.ciiva.com/23763/7427932-23763047.pdf?src-supplier=Newark, ComponentLink5Description=https://datasheet.ciiva.com/4939/7427932-72413-4939403.pdf?src-supplier=Mouser, ComponentLink5URL=https://datasheet.ciiva.com/4939/7427932-72413-4939403.pdf?src-supplier=Mouser, ComponentLink6Description=https://datasheet.ciiva.com/1014/7427932-1014098.pdf?src-supplier=Digi-Key, ComponentLink6URL=https://datasheet.ciiva.com/1014/7427932-1014098.pdf?src-supplier=Digi-Key, ComponentLink7Description=https://datasheet.ciiva.com/1014/7427932-1014099.pdf?src-supplier=Digi-Key, ComponentLink7URL=https://datasheet.ciiva.com/1014/7427932-1014099.pdf?src-supplier=Digi-Key, ComponentLink8Description=https://datasheet.ciiva.com/22711/1696119-22711445.pdf?src-supplier=Element14, ComponentLink8URL=https://datasheet.ciiva.com/22711/1696119-22711445.pdf?src-supplier=Element14, Depth=4.75mm, Height=3mm, Impedance=98R, Length=7.8mm, Manufacturer Part Number=7427932, Max DC Current=6A, Mount="Surface Mount", Number of Lines=1, Packaging="Tape and Reel", REACH SVHC=Unknown, RoHS=Yes, Shielding=Unshielded, Stock 1=698, Supplier 1=Digi-Key, Termination=SMD/SMT, Width=0.187inch
P2: library part CMP-1502-00440-1, "THT Male Header WR-MPC3, Vertical, Single Row, pitch 3 mm, 2 pins", Contact Resistance=10mOhm, Manufacturer="Wurth Elektronik", Operating Temperature=-40to105degC, Working Voltage=250VAC, Datasheet URL=https://katalog.we-online.de/em/datasheet/6620xx11122.pdf, Gender=Male, Manufacturer URL=http://www.we-online.de, Mounting Technology=THT, Orientation=Vertical, Package Reference=66200211122, Packaging=Tube, Part Number=66200211122, Pin Number=2, Pitch=3mm, Publisher=WurthElektronik
P3: library part CMP-2000-05419-1, "Male Header, Pitch 2.54 mm, 1 x 4 Position, Height 10.03 mm, Tail Length 3.56 mm, RoHS, Bulk", Color=White, Current, Rating="5 /  / A", Flammability Rating=UL94V-0, Manufacturer="TE Connectivity", Temperature, Operating="-55to+105 /  / degC", Voltage, Rating="250 /  / V", Agency Approvals=CSA,UL, Angle=Straight, Brand/Series=MTA-100Series, Color, Housing=White, Connector Type=MTA-100, Contact Centerline Spacing="0.100 /  / in.", Contact Mating Area Plating=Tin, Contact Plating=Tin, Contact Shape=Square, Contact Termination Area Plating=Tin, Datasheet URL=https://datasheet.ciiva.com/16286/eng-ds-82056-mta-0608-16286228.pdf, Datasheet Version=Dec-14, Length, Overall="0.4 /  / \"", Length, Pin="0.14 /  / \"", Length, Terminal Post="0.14 /  / in.", Manufacturer URL=http://www.te.com/, Material, Contact=CopperAlloy, Material, Housing=Polyester, Mount Angle=Vertical, Mounting Hole Size="0.04 /  / \"", Mounting Type=PCMount, Number of Contacts=4, Number of Positions=4, Number of Rows=1, Pin Spacing="0.1 /  / \"", Primary Type=InterconnectSystem, Size, Post="0.025 /  / in.", Special Features=Pinstrip, Standards=RoHSCompliant,ELVCompliant,UL94V-0, Termination=Solder, Type=PCBPlug
P4 P5 P6: library part CMP-1024-00327-1, "0.025\" SQ Post Header, Through-hole, Vertical, -55 to 125 degC, 2.54 mm Pitch, 2-Pin, Male, RoHS", Manufacturer=Samtec, PartNumber=TSW-102-26-G-S, Temperature Range="-55 to 125 degC", ComponentLink1Description="Manufacturer URL", ComponentLink1URL=http://www.samtec.com, ComponentLink2Description=Datasheet, ComponentLink2URL=http://www.samtec.com/documents/webfiles/pdf/TSW_TH.PDF, ComponentLink3Description="Package Specification", ComponentLink3URL=http://www.samtec.com/documents/webfiles/cpdf/TSW-XXX-XX-XXX-X-XX-XXX-MKT.pdf, DatasheetVersion=F-214, Mounting Technology=Through-hole, Orientation=Vertical, PackageDescription=".025[0.64] SQ. Post Terminal Strip Assembly", PackageReference=TSW-102-26-XX-S, PackageVersion="DM, 8/1988", Pitch="2.54 mm", RoHS=True
P8: library part CMP-1024-00338-1, "0.025\" SQ Post Header, Through-hole, Vertical, -55 to 125 degC, 2.54 mm Pitch, 6-Pin, Male, RoHS", Manufacturer=Samtec, PartNumber=TSW-103-08-G-D, Temperature Range="-55 to 125 degC", ComponentLink1Description="Manufacturer URL", ComponentLink1URL=http://www.samtec.com, ComponentLink2Description=Datasheet, ComponentLink2URL=http://www.samtec.com/documents/webfiles/pdf/TSW_TH.PDF, ComponentLink3Description="Package Specification", ComponentLink3URL=http://www.samtec.com/documents/webfiles/cpdf/TSW-XXX-XX-XXX-X-XX-XXX-MKT.pdf, DatasheetVersion=F-214, Mounting Technology=Through-hole, Orientation=Vertical, PackageDescription=".025[0.64] SQ. Post Terminal Strip Assembly", PackageReference=TSW-103-08-X-D, PackageVersion="DM, 8/1988", Pitch="2.54 mm", RoHS=True
P9: library part CMP-2000-06636-1, "Male Header, Pitch 2.54 mm, 2 x 3 Position, Height 8.64 mm, Tail Length 3 mm, -40 to 105 degC, RoHS, Bulk", Color=Black, Manufacturer=Harwin-Inc., Package Description="Male Header, Pitch 2.54 mm, 2 x 3 Position, Height 8.64 mm, Tail Length 3 mm", Category=Connectors,Interconnects, Connector Type=Header,Unshrouded,Breakaway, Contact Finish=Tin, Contact Finish Thickness=-, Contact Mating Length="0.240\"(6.10mm)", Contact Type=MalePin, Datasheet URL=https://datasheet.ciiva.com/26899/getdatasheetpartid-483857-26899433.pdf, Datasheet Version=12/2006, Family=RectangularConnectors-Headers,MalePins, Fastening Type=-, Features=-, Manufacturer URL=https://www.harwin.com/, Mounting Technology=ThroughHole, Mounting Type=ThroughHole, Number of Positions=6, Number of Positions Loaded=All, Number of Rows=2, Package Reference=M20-9980346, Packaging=Bulk, Pitch="0.100\"(2.54mm)", Row Spacing="0.100\"(2.54mm)", Series=M20, Termination=Solder
Q1 Q2: library part CMP-1048-00631-1, "General Purpose Transistor, NPN Silicon, 3-Pin SOT-23, Pb-Free, Tape and Reel", Manufacturer="On Semiconductor", PartNumber=MMBT3904LT1G, ComponentLink1Description="Manufacturer URL", ComponentLink1URL=http://www.onsemi.com/, ComponentLink2Description=Datasheet, ComponentLink2URL=http://www.onsemi.cn/pub_link/Collateral/MMBT3904LT1-D.PDF, ComponentLink3Description="Package Specification", ComponentLink3URL=http://www.onsemi.cn/pub_link/Collateral/318-08.PDF, DatasheetVersion="Rev. 12", fT Min (MHz)=300, IC Continuous (A)=0.2, Mounting Technology="Surface Mount", PackageDescription="3-Pin Small Outline Transistor, Body 2.92 x 1.3 mm, Pitch 0.95 mm", PackageReference=SOT-23-3-318-08, PackageVersion="Rev. AP, 11/2009", Packing="Tape and Reel", Polarity=NPN, RoHS=TRUE
R4: library part CMP-2100-03664-1, "Chip Resistor, 10 KOhm, +/- 1%, 01 W, -55 to 155 degC, 0603 (1608 Metric), RoHS, Tape and Reel", Case Code (Imperial)=0603, Case Code (Metric)=1608, Manufacturer=Yageo, Max Operating Temperature=155degC, Min Operating Temperature=-55degC, Package Description="2-Pin Surface Mount Device, Body 1.6 x 0.8 mm", Power Rating=100mW, Resistance=10KOhm, Temperature Coefficient=100ppm/degreesC, Tolerance=1%, Voltage Rating=75V, Voltage Rating (DC)=50V, Case/Package=0603, Composition=ThickFilm, Datasheet URL=http://www.yageo.com/NewPortal/yageodocoutput?fileName=/pdf/R-Chip/PYu-RC_Group_51_RoHS_L_5.pdf, Datasheet Version="Rev. 5, 10/2016", Depth=0.8mm, Height=0.45mm, Lead Free=LeadFree, Lead Pitch=0.3mm, Length=1.6mm, Manufacturer URL=http://www.yageo.com/, Military Standard=Not, Number of Pins=2, Package Reference=0603, Packaging=TapeandReel, REACH SVHC=NoSVHC, RoHSCompliant=true, Termination=SMD/SMT, Weight=7.1E-05oz, Width=0.8mm
R5 R12 R13 R14 R15: library part CMP-2001-03595-1, Manufacturer="Vishay Dale", Part Number=CRCW08051K00FKEA
R6 R7: library part CMP-2003-00383-1, Manufacturer=Panasonic, Part Number=ERJ-8ENF4640V
R8 R9 R10 R11: library part CMP-1666-00005-4, "Chip Resistor, 10 KOhm, +/- 1%, 100 mW, -55 to 155 degC, 0603 (1608 Metric), RoHS, Tape and Reel", Manufacturer="Vishay Semiconductor", Max Operating Temperature="155 degC", Min Operating Temperature="-55 degC", Package Quantity=5000, Voltage Rating="75 V", ComponentLink1Description="Manufacturer URL", ComponentLink1URL=http://www.vishay.com/, ComponentLink2Description=Datasheet, ComponentLink2URL=https://datasheet.ciiva.com/11809/0900766b80d98afc-11809037.pdf, DatasheetVersion=06/2012, Height="0.45 mm", Length="1.55 mm", Mounting Technology="Surface Mount", PackageDescription="2-Pin Surface Mount Device, Body 1.575 x 0.85 mm", PackageReference=0603, Packaging="Tape and Reel", REACH SVHC=Unknown, RoHSCompliant=true